# Altium PCB slave.PcbDoc
Units mil, origin at the board's own origin, x right, y up, seen from the top; angles counter-clockwise.
Board outline 6000 x 4000 mil, 2 copper layers (Top Layer, Bottom Layer); 82 components, 86 nets, 301 pads, 28 vias.
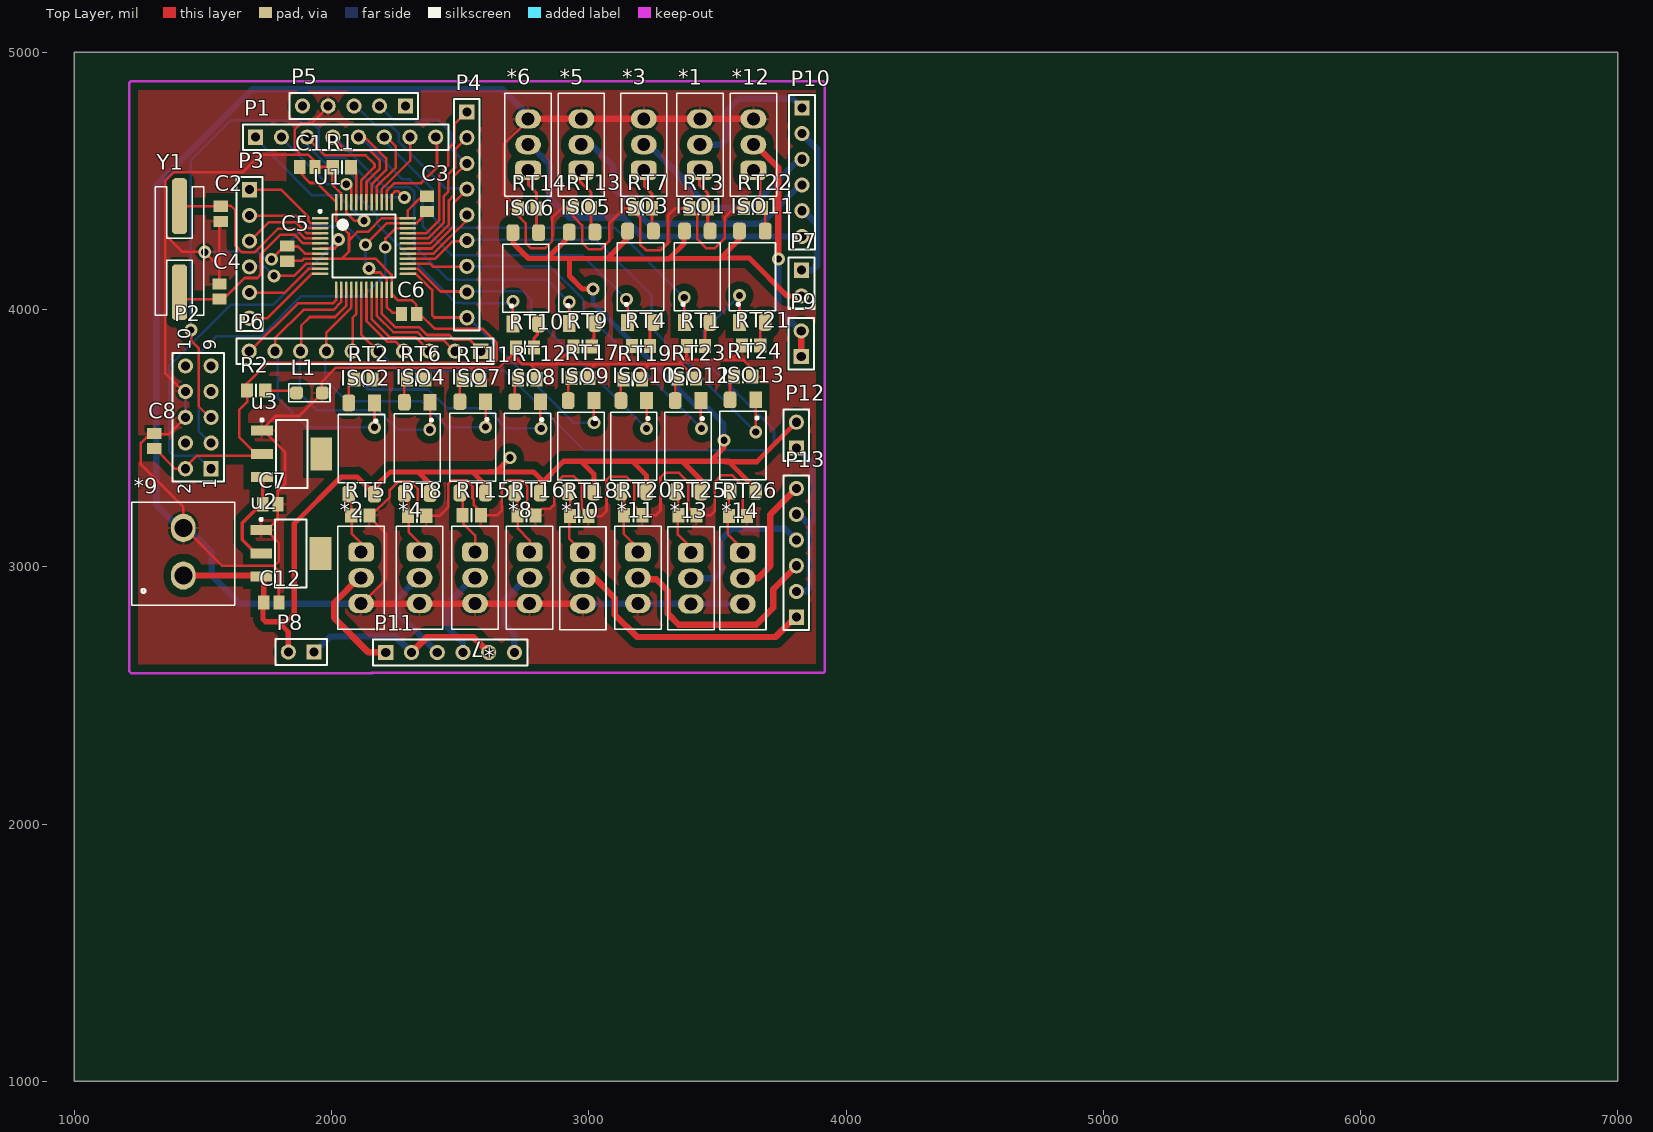
[diagram p0: Top Layer view]
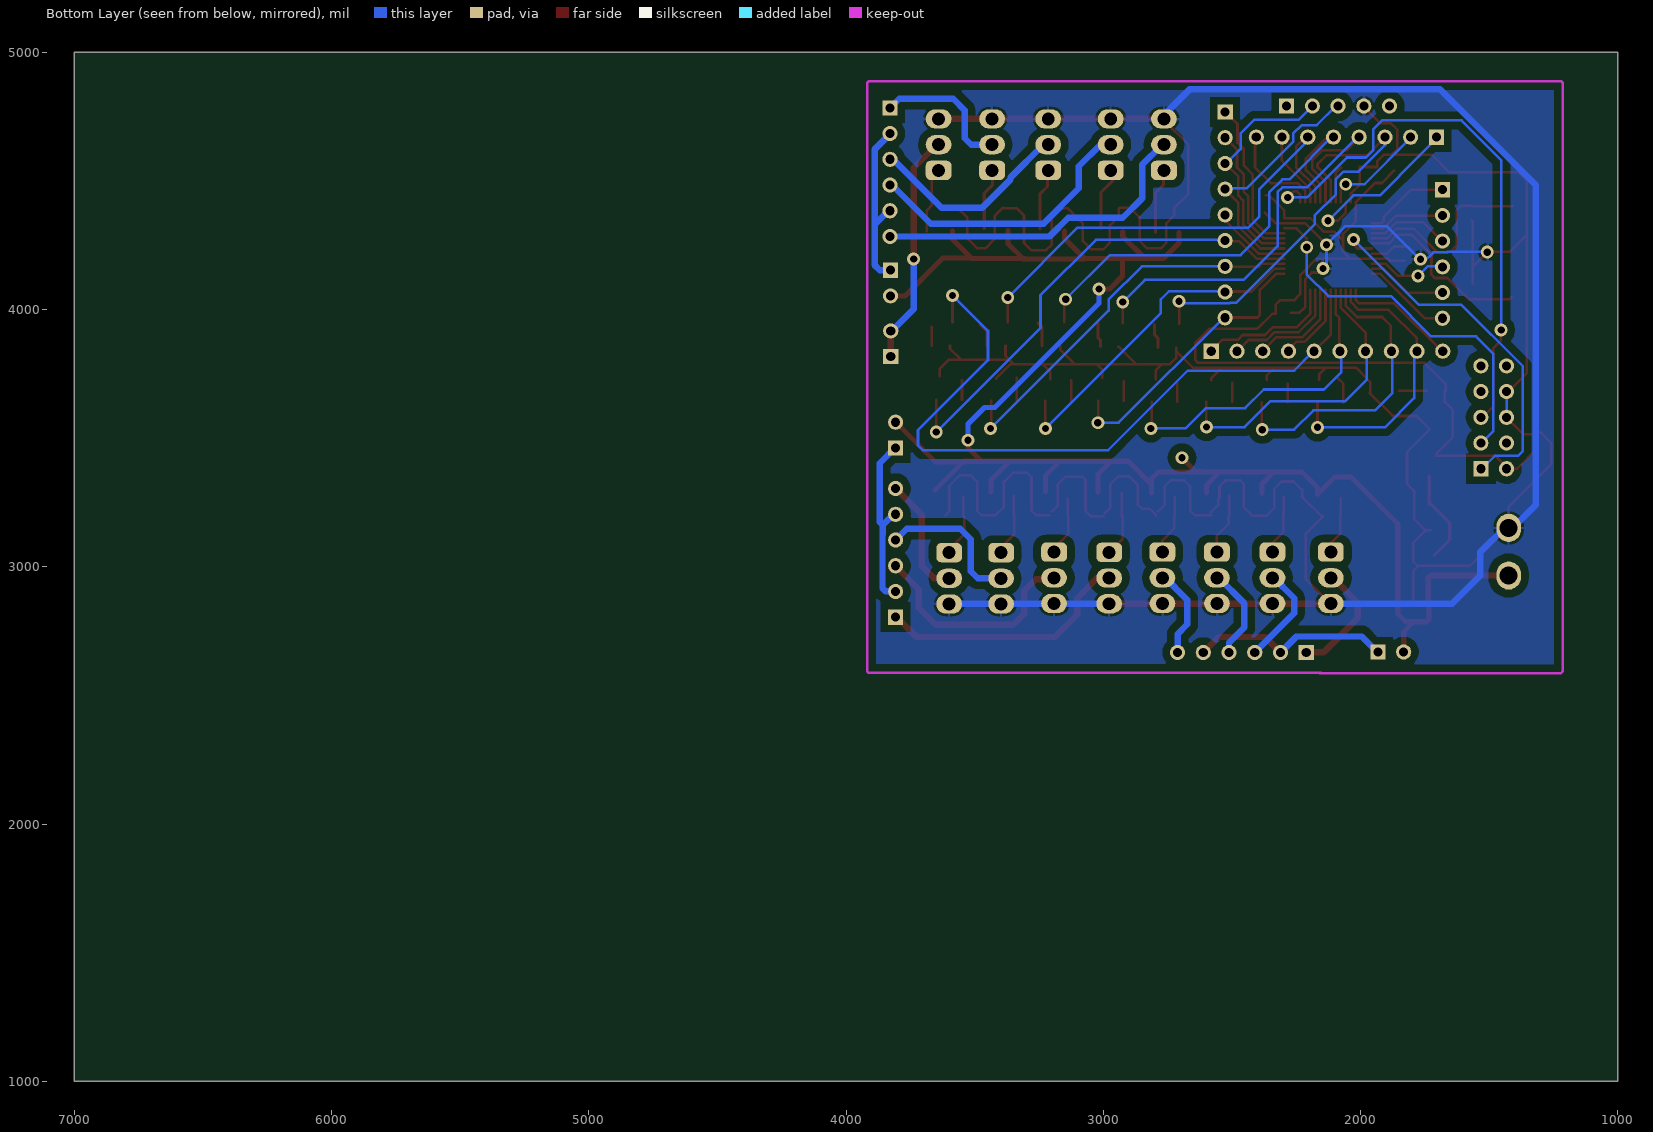
[diagram p1: Bottom Layer view, seen from below]

## Layer stack, top to bottom
Top Solder: solder mask 0.4, Solder Resist, Dk 3.5
Top Layer: signal copper 1.4
Dielectric 1: dielectric 12.6, FR-4, Dk 4.8
Bottom Layer: signal copper 1.4
Bottom Solder: solder mask 0.4, Solder Resist, Dk 3.5

## Board outline
1000,1000 7000,1000 7000,5000 1000,5000

## Design rules (kind name [scope] priority, off if disabled: settings)
Clearance "PolyGon Pour Clearance" [InPolyGon] p1: gap=30
Clearance [All] p2: gap=9
Height [All] p1 off: minheight=0 maxheight=1000 prefheight=500
PolygonConnect [All] p1: connectstyle=Relief reliefconductorwidth=10 reliefentries=4 polygonreliefangle="90 Angle" airgapwidth=10
RoutingVias [All] p1: holewidth=25 width=60 viastyle="Through Hole" minholewidth=25 minwidth=40 maxholewidth=40 maxwidth=80
SolderMaskExpansion [All] p1: expansion=4
UnpouredPolygon [All] p1: allowunpoured=FALSE
Width [All] p1: maxlimit=100 minlimit=10 preferedwidth=20 minimp=50.000000 maximp=50.000000 favimp=50.000000
28 further rules are at their usual default settings.

## Components (designator, comment, footprint, x,y, rotation, side; value= is the part's Value field where it differs from the comment)
*1 "IRF540N" TO220 3432,4641 r90 top
*2 "IRF540N" TO220 2115,2957 r270 top
*3 "IRF540N" TO220 3214,4641 r90 top
*4 "IRF540N" TO220 2342,2957 r270 top
*5 "IRF540N" TO220 2971,4641 r90 top
*6 "IRF540N" TO220 2764,4641 r90 top
*7 "IRF540N" TO220 2558,2957 r270 top
*8 "IRF540N" TO220 2770,2957 r270 top
*9 "domino2" Domino_2 1424,2976 r90 top
*10 "IRF540N" TO220 2977,2956 r270 top
*11 "IRF540N" TO220 3191,2957 r270 top
*12 "IRF540N" TO220 3640,4641 r90 top
*13 "IRF540N" TO220 3397,2955 r270 top
*14 "IRF540N" TO220 3599,2955 r270 top
C1 "Cap Pol3" C0805 1906,4554 r0 top
C2 "Cap Pol3" C0805 1569,4372 r270 top
C3 "Cap Pol3" C0805 2371,4411 r270 top
C4 "Cap Pol3" C0805 1564,4070 r90 top
C5 "Cap Pol3" C0805 1828,4217 r90 top
C6 "Cap Pol3" C0805 2302,3983 r180 top
C7 "Cap Pol3" C0805 1762,3243 r0 top
C8 "Cap Pol3" C0805 1311,3489 r90 top
C12 "Cap Pol3" C0805 1766,2861 r0 top
ISO1 "opto" opto_smd 3372,3950 r90 top
ISO2 "opto" opto_smd 2167,3637 r270 top
ISO3 "opto" opto_smd 3151,3950 r90 top
ISO4 "opto" opto_smd 2383,3640 r270 top
ISO5 "opto" opto_smd 2924,3946 r90 top
ISO6 "opto" opto_smd 2705,3944 r90 top
ISO7 "opto" opto_smd 2599,3642 r270 top
ISO8 "opto" opto_smd 2812,3642 r270 top
ISO9 "opto" opto_smd 3020,3646 r270 top
ISO10 "opto" opto_smd 3225,3646 r270 top
ISO11 "opto" opto_smd 3586,3950 r90 top
ISO12 "opto" opto_smd 3436,3646 r270 top
ISO13 "opto" opto_smd 3649,3649 r270 top
L1 "led_smd" led_smd 1914,3676 r0 top
P1 "Header 8" HDR1X8 1705,4670 r0 top
P2 "Header 5X2" HDR2X5 1532,3381 r90 top
P3 "Header 6" HDR1X6 1681,4466 r270 top
P4 "Header 9" HDR1X9 2526,4768 r270 top
P5 "uart1" HDR1X5 2287,4791 r180 top
P6 "Header 10" HDR1X10 2580,3838 r180 top
P7 "Header 2" HDR1X2 3827,4153 r270 top
P8 "Header 2" HDR1X2 1932,2669 r180 top
P9 "Header 2" HDR1X2 3826,3817 r90 top
P10 "Header 6" HDR1X6 3829,4784 r270 top
P11 "Header 6" HDR1X6 2211,2667 r0 top
P12 "Header 2" HDR1X2 3807,3462 r90 top
P13 "Header 6" HDR1X6 3807,2804 r90 top
R1 "" 6-0805_N 2040,4553 r180 top
R2 "" 6-0805_N 1707,3685 r180 top
RT1 "Res Thermal" 6-0805_N 3417,3858 r180 top
RT2 "Res Thermal" 6-0805_N 2124,3728 r0 top
RT3 "Res Thermal" 6-0805_N 3427,4394 r180 top
RT4 "Res Thermal" 6-0805_N 3203,3858 r180 top
RT5 "Res Thermal" 6-0805_N 2112,3199 r0 top
RT6 "Res Thermal" 6-0805_N 2329,3728 r0 top
RT7 "Res Thermal" 6-0805_N 3211,4394 r180 top
RT8 "Res Thermal" 6-0805_N 2333,3198 r0 top
RT9 "Res Thermal" 6-0805_N 2976,3856 r180 top
RT10 "Res Thermal" 6-0805_N 2752,3852 r180 top
RT11 "Res Thermal" 6-0805_N 2545,3726 r0 top
RT12 "Res Thermal" 6-0805_N 2761,3729 r0 top
RT13 "Res Thermal" 6-0805_N 2973,4395 r180 top
RT14 "Res Thermal" 6-0805_N 2761,4393 r180 top
RT15 "Res Thermal" 6-0805_N 2545,3200 r0 top
RT16 "Res Thermal" 6-0805_N 2758,3199 r0 top
RT17 "Res Thermal" 6-0805_N 2968,3734 r0 top
RT18 "Res Thermal" 6-0805_N 2963,3197 r0 top
RT19 "Res Thermal" 6-0805_N 3171,3729 r0 top
RT20 "Res Thermal" 6-0805_N 3173,3200 r0 top
RT21 "Res Thermal" 6-0805_N 3631,3860 r180 top
RT22 "Res Thermal" 6-0805_N 3638,4395 r180 top
RT23 "Res Thermal" 6-0805_N 3381,3732 r0 top
RT24 "Res Thermal" 6-0805_N 3600,3740 r0 top
RT25 "Res Thermal" 6-0805_N 3384,3200 r0 top
RT26 "Res Thermal" 6-0805_N 3580,3197 r0 top
U1 "stm32f103c8t6" LQFP48_stm32 2126,4247 r0 top
u2 "ASM1117-5" SOT223 1842,3052 r0 top
u3 "ASM1117-3.3" SOT223 1845,3439 r0 top
Y1 "XTAL" xtal_smd 1409,4402 r270 top

## Footprints (in the part's own frame and the unit in brackets; to place one, negate y for a bottom-side part, rotate by r counter-clockwise, add the part's x,y. Pads: shape width x height; smd on the part's side, far side on the other; paste and mask are expansions set on the pad)
6-0805_N [mm] "Chip Resistor, Body 2.0x1.2mm, IPC Medium Density"
  rect 1.2x1.4 smd: 1(-0.9,0) 2(0.9,0)
  silkscreen extent 0,-0.6 0,0.6, body extent -1.07,-0.7 1.07,0.7, height 0.7
C0805 [mm] "Chip Capacitor, Body 2.0x1.3mm, IPC High Density"
  rect 1.1x1.4 smd: 1(-0.75,0) 2(0.75,0)
  body extent -1.1,-0.72 1.1,0.72, height 1.4
Domino_2 [mil]
  oval 110x95 hole 70: 1(-10,0) 2(175,0)
  silkscreen extent -125,-200 275,200
HDR1X2 [mm] "Connector; Header; 2 Position"
  rect 1.5x1.5 hole 0.9: 1(0,0)
  round 1.5 hole 0.9: 2(2.54,0)
  silkscreen extent -1.27,-1.27 3.81,1.27
HDR1X5 [mm] "Connector; Header; 5 Position"
  rect 1.5x1.5 hole 0.9: 1(0,0)
  round 1.5 hole 0.9: 2(2.54,0) 3(5.08,0) 4(7.62,0) 5(10.16,0)
  silkscreen extent -1.27,-1.27 11.43,1.27
HDR1X6 [mm] "Connector; Header; 6 Position"
  rect 1.5x1.5 hole 0.9: 1(0,0)
  round 1.5 hole 0.9: 2(2.54,0) 3(5.08,0) 4(7.62,0) 5(10.16,0) 6(12.7,0)
  silkscreen extent -1.27,-1.27 13.97,1.27
HDR1X8 [mm] "Connector; Header; 8 Position"
  rect 1.5x1.5 hole 0.9: 1(0,0)
  round 1.5 hole 0.9: 2(2.54,0) 3(5.08,0) 4(7.62,0) 5(10.16,0) 6(12.7,0) 7(15.24,0) 8(17.78,0)
  silkscreen extent -1.27,-1.27 19.05,1.27
HDR1X9 [mm] "Connector; Header; 9 Position"
  rect 1.5x1.5 hole 0.9: 1(0,0)
  round 1.5 hole 0.9: 2(2.54,0) 3(5.08,0) 4(7.62,0) 5(10.16,0) 6(12.7,0) 7(15.24,0) 8(17.78,0) 9(20.32,0)
  silkscreen extent -1.27,-1.27 21.59,1.27
HDR1X10 [mm] "Connector; Header; 10 Position"
  rect 1.5x1.5 hole 0.9: 1(0,0)
  round 1.5 hole 0.9: 2(2.54,0) 3(5.08,0) 4(7.62,0) 5(10.16,0) 6(12.7,0) 7(15.24,0) 8(17.78,0) 9(20.32,0) 10(22.86,0)
  silkscreen extent -1.27,-1.27 24.13,1.27
HDR2X5 [mm] "Connector; Header; 5x2 Position"
  rect 1.5x1.5 hole 0.9: 1(0,0)
  round 1.5 hole 0.9: 2(0,2.54) 3(2.54,0) 4(2.54,2.54) 5(5.08,0) 6(5.08,2.54) 7(7.62,0) 8(7.62,2.54) 9(10.16,0) 10(10.16,2.54)
  silkscreen extent -1.27,-1.27 11.43,3.81
led_smd [mil]
  rrect50% 50x50 smd: 1(-50,0) 2(50,0)
  silkscreen extent -80,-35 80,35
LQFP48_stm32 [mm] "TSQFP, 48-Leads, Body 7.00x7.00mm, Pitch 0.50mm, IPC High Density"
  rect 1.65x0.25 smd: 1(-4.325,2.75)
  oval 1.65x0.25 smd: 2(-4.325,2.25) 3(-4.325,1.75) 4(-4.325,1.25) 5(-4.325,0.75) 6(-4.325,0.25) 7(-4.325,-0.25) 8(-4.325,-0.75) 9(-4.325,-1.25) 10(-4.325,-1.75) 11(-4.325,-2.25) 12(-4.325,-2.75) 25(4.325,-2.75) 26(4.325,-2.25) 27(4.325,-1.75) 28(4.325,-1.25) 29(4.325,-0.75) 30(4.325,-0.25) 31(4.325,0.25) 32(4.325,0.75) 33(4.325,1.25) 34(4.325,1.75) 35(4.325,2.25) 36(4.325,2.75)
  oval 0.25x1.65 smd: 13(-2.75,-4.325) 14(-2.25,-4.325) 15(-1.75,-4.325) 16(-1.25,-4.325) 17(-0.75,-4.325) 18(-0.25,-4.325) 19(0.25,-4.325) 20(0.75,-4.325) 21(1.25,-4.325) 22(1.75,-4.325) 23(2.25,-4.325) 24(2.75,-4.325) 37(2.75,4.325) 38(2.25,4.325) 39(1.75,4.325) 40(1.25,4.325) 41(0.75,4.325) 42(0.25,4.325) 43(-0.25,4.325) 44(-0.75,4.325) 45(-1.25,4.325) 46(-1.75,4.325) 47(-2.25,4.325) 48(-2.75,4.325)
  silkscreen extent -4.45,-3.1 3.1,3.55, body extent -3.5,-3.5 3.5,3.5, height 1.6
opto_smd [mil]
  rect 65x50 smd: 1(0,0)
  rrect50% 65x50 smd: 2(0,-100) 3(355,-100) 4(355,0)
  silkscreen extent 45,-140 310,40
SOT223 [mm] "SOT223, 4-Leads, Body 6.50x7.00mm (avg), Pitch 2.30mm, IPC Medium Density"
  rect 2.15x1 smd: 1(-2.93,2.3) 2(-2.93,0) 3(-2.93,-2.3)
  rect 2.15x3.25 smd: 4(2.93,0)
  silkscreen extent -3.05,-3.35 1.55,3.47, body extent -1.86,-3.35 1.86,3.35, height 1.8
TO220 [mil]
  rrect50% 75x100 hole 50: 1(-100,0)
  oval 75x100 hole 50: 2(0,0) 3(100,0)
  silkscreen extent -200,-90 200,90
xtal_smd [mil]
  rrect50% 217x59 smd: 1(0,0) 2(335,0)
  silkscreen extent -75,-95 425,95

## Part data
C1 C2 C3 C4 C5 C6 C7 C8 C12: "Polarized Capacitor (Surface Mount)"
P1: "Header, 8-Pin"
P2: "Header, 5-Pin, Dual row"
P3 P10 P11 P13: "Header, 6-Pin"
P4: "Header, 9-Pin"
P5: library part "Header 5", "Header, 5-Pin"
P6: "Header, 10-Pin"
P7 P8 P9 P12: "Header, 2-Pin"
R1 R2: library part "Res Thermal", "Thermistor"
RT1 RT2 RT3 RT4 RT5 RT6 RT7 RT8 RT9 RT10 RT11 RT12 RT13 RT14 RT15 RT16 RT17 RT18 RT19 RT20 RT21 RT22 RT23 RT24 RT25 RT26: "Thermistor"
u3: library part ASM1117-5

## Via types
v1: diameter 50, hole 28, Top Layer to Bottom Layer, 28 vias

## Nets (pads, with @x,y where several pads share a name; then routed paths per layer and width w, separated by ;. In a path a pad name is that pad's centre, name@x,y a point inside that pad or via, vN(x,y) a via of type N, cw(c..) or ccw(c..) an arc to the next point about the centre after c; other vN are vias at no path point)
3V: C1.1 C3.1 C5.1 C6.1 C8.1 P2.2 R2.2 U1.9 U1.24 U1.36 U1.48 u3.2 | length 3691.3
  Top Layer w10: C8.1@1313,3459 1391,3381 P2.2 1432,3387 1477,3432 u3.2@1706,3432 ; R2.2@1669,3684 1669,3711 1751,3793 2631,3793 2643,3805 2643,3870 2588.53,3924.47 2401.53,3924.47 2343,3983 C6.1 ; R2.2 1671.57,3640.57 1641,3610 1641,3504 u3.2@1706,3439 ; C5.1@1828,4189 1885,4189 1893.79,4197.79 U1.9@1948,4197.79 ; C1.1@1869,4540 1917,4492 1943.01,4492 U1.48 2017.73,4344.27 2068,4294 2068,4226 2040,4198 ; U1.9@1948,4198 2040,4198 ; 2069,4271 2100,4302 2142,4302 2195.27,4355.27 U1.36 2296.28,4385.28 2328.13,4417.13 2329.13,4417.13 2356,4444 C3.1@2368,4444 ; U1.24@2234,4082 2234,4135 2171,4198 2040,4198 ; U1.24 2234.27,4059.73 2258.73,4035.27 2313.27,4035.27 2330,4018.54 C6.1@2330,3984
5V: C7.1 u2.2 u3.3 | length 367.1
  Top Layer w15: u2.2@1713,3045 1653,3105 1653,3170 1726,3243 C7.1 u3.3@1732.47,3350.53
GND: *1.3 *2.3 *3.3 *4.3 *5.3 *6.3 *7.3 *8.3 *9.2 *10.3 *11.3 *12.3 *13.3 *14.3 C1.2 C2.2 C3.2 C4.2 C5.2 C6.2 C7.2 C8.2 C12.2 L1.2 P2.6 P2.8 P5.4 R1.2 RT1.2 RT2.2 RT3.2 RT4.2 RT5.2 RT6.2 RT7.2 RT8.2 RT9.2 RT10.2 RT11.2 RT12.2 RT13.2 RT14.2 RT15.2 RT16.2 RT17.2 RT18.2 RT19.2 RT20.2 RT21.2 RT22.2 RT23.2 RT24.2 RT25.2 RT26.2 U1.8 U1.23 U1.35 U1.47 u2.1 u3.1 | length 20877.6
  Top Layer w10: C8.2@1299,3522 1259,3482 1259,3398 1424,3233 *9.2 ; C8.2@1313,3515 1366,3515 P2.6 ; *9.2@1429,3150 1575,3004 1774,3004 ; P2.8@1429,3677 1354,3752 1354,4290 ; v1@1506,4224 1420,4224 1354,4290 ; v1(1507,4223) 1563,4167 1563,4143 ; C4.2 1564,4344 C2.2@1567,4347 ; u2.1 1744.45,3142.55 u2.1@1746.5,3140.5 ; u3.1@1730,3534 1782,3586 1874,3586 L1.2 ; u3.1@1731,3534 1819,3446 1819,3322 1791.53,3294.53 C7.2 1791.53,3185.53 u2.1@1746.5,3140.5 ; u2.1@1744,3138 u2.1@1746.5,3140.5 ; v1(1766.44,4195.71) 1767.23,4195.71 1818.04,4246.53 C5.2 ; 1793,2985 1774,3004 ; C12.2 1795.53,2983.47 ; C5.2@1827,4245 1869,4245 1896.53,4217.47 U1.8 ; L1.2@1962,3679 1962,3718 2018,3774 2134,3774 ; P5.4@1982,4784 1922,4724 1882,4724 1857,4699 1857,4625 1881,4601 ; R1.2@2003,4554 C1.2 1935.53,4575.47 1910,4601 1881,4601 ; R1.2@2004,4546 2002,4544 2002,4486 2024.24,4463.76 2025.57,4463.76 2037.42,4451.91 U1.47 ; *2.3@2122,2861 2212,2951 2212,3129 2147.43,3193.57 RT5.2 2153.98,3199 2227,3272.02 2227,3298.98 2259.52,3331.5 2306.48,3331.5 2335.19,3302.79 2335.19,3227.81 RT8.2@2366,3197 ; v1(2132,4252) 2215.58,4335.58 U1.35 2330.91,4335.58 2342.76,4347.43 2342.76,4347.76 C3.2@2371,4376 ; v1(2146,4159) 2146,4156 2158,4144 2189,4144 2214.58,4118.42 U1.23 2214.58,4010.42 2237,3988 C6.2@2270,3988 ; RT2.2@2163,3731.57 RT2.2 2159.43,3748.57 2134,3774 ; RT6.2 2364.43,3742.57 2333,3774 ; RT8.2 2420,3198 2453,3231 2453,3322 2467,3336 2525,3336 2548,3313 2548,3267 2553,3262 2553,3240 RT15.2@2581,3212 ; RT15.2 2644,3200 2662,3218 2662,3313 2685,3336 2738,3336 2761,3313 2761,3241 RT16.2@2787,3215 ; RT11.2 2580.43,3731.57 2538,3774 ; RT10.2 RT10.2@2716.57,3838.57 ; RT14.2 RT14.2@2724,4394.57 ; *6.3@2763,4735 2669,4641 2669,4449.57 RT14.2@2724,4394.57 ; 2773,3787 2796.43,3763.57 RT12.2 ; RT16.2 2820.43,3226 2850,3226 2865,3241 2865,3317 2900,3352 2941,3352 2972,3321 2972,3231 RT18.2@2994,3209 ; RT13.2 2895,4395 2858,4358 2858,4267 2829,4238 2776,4238 2755,4259 2755,4335 2724,4366 RT14.2@2724,4394.57 ; RT13.2@2940,4392 2940,4361 2974,4327 2974,4260 3000,4234 3047,4234 3079,4266 3079,4334 3139,4394 RT7.2 ; RT9.2 2872.57,3788 ; RT18.2 3049,3197 3069,3217 3069,3338 3081,3350 3147,3350 3176,3321 3176,3239 RT20.2@3200,3215 ; RT17.2 3003.43,3765.43 3025,3787 ; 3112,3789 3167.57,3844.57 RT4.2 ; RT7.2@3179,4379 3200,4358 3200,4253 3222,4231 3280,4231 3308,4259 3308,4365 3337,4394 RT3.2 ; RT19.2 3206.43,3758.43 3236,3788 ; RT20.2 3260,3200 3279,3219 3279,3348 3296,3365 3351,3365 3386.19,3329.81 3386.19,3232.81 RT25.2@3416,3203 ; 3349,3788 3360.55,3788 3416.43,3732.11 RT23.2 ; RT1.2@3380,3860 3380,3820 3364,3804 ; RT3.2@3391,4395 3422,4364 3422,4274 3458,4238 3489,4238 3528,4277 3528,4357 3566,4395 RT22.2 ; RT25.2 3473,3200 3490,3217 3490,3330 3516,3356 3556.98,3356 3598,3314.98 3598,3216 RT26.2@3614,3200 ; 3553,3805 3595.57,3847.57 RT21.2 ; RT24.2 3635.43,3770.57 3602,3804 3364,3804 ; 1354,4290 1354,4501 1386,4533 1653,4533 1721,4601 1881,4601 ; u2.1@1746.5,3140.5 1795,3092 1795,3020 1779,3004 1774,3004 ; 2134,3774 2333,3774 ; 2333,3774 2538,3774 ; 2538,3774 2652,3774 RT10.2@2716.57,3838.57 ; RT10.2@2716.57,3838.57 2716.57,3811.43 2740,3788 2872.57,3788 ; 2872.57,3788 3236,3788 ; 3236,3788 3348,3788 3364,3804
  Top Layer w20: *12.3@3642,4741 *12.3@3644,4741
  Top Layer w25: *2.3 *4.3 *7.3 *8.3 *10.3@2979,2857 ; *6.3 *5.3 *3.3 *1.3 *12.3 *12.3@3642,4741
  Bottom Layer w10: P2.6@1432,3582 P2.8 ; v1(1507,4223) 1508,4224 1661.44,4224 1662.97,4222.47 1716.65,4222.47 1754.92,4184.2 v1(1766.44,4195.71) ; v1@1767,4193 1897,4323 2061,4323 v1(2132,4252) v1@2132,4173 ; v1(2146,4159) v1@2146,4162
  Bottom Layer w25: *9.2@1425,3151 *9.2 1408,3151 1318,3241 1318,4483.48 1691.52,4857 2663,4857 2764,4756 *6.3 ; *9.2@1433,3158 1535,3056 1535,2965 1643,2857 *2.3 ; *10.3 *11.3@3190,2856 ; *11.3 *14.3@3602,2857
GRIP: *12.2 P9.1 P9.2 | length 903.9
  Top Layer w25: *12.2 3646.92,4641 3737,4550.92 v1(3737,4196) ; P9.1 P9.2@3826,3914
  Bottom Layer w25: v1(3737,4196) 3737,4002 3823,3916 P9.2@3823,3914
M1A1: *1.2 P10.1 | length 546.1
  Bottom Layer w25: *1.2 3513,4641 3538,4666 3538,4774 3583,4819 3793,4819 P10.1@3827,4785
M1A2: *3.2 P10.3 | length 805.5
  Bottom Layer w25: *3.2 3233,4641 3360.5,4513.5 3360.5,4505.58 3471.08,4395 3628,4395 3821,4588 P10.3@3833,4588
M1B1: *5.2 P10.4 | length 1096.7
  Bottom Layer w25: *5.2 3011,4641 3095,4557 3095,4471 3232,4334 3671,4334 P10.4@3826,4489
M1B2: *6.2 P10.6 | length 1294.6
  Bottom Layer w25: *6.2 2770.92,4641 2849,4562.92 2849,4432 2924,4357 3136,4357 3209,4284 P10.6 P10.6@3834,4284
M2A1: *2.2 P11.1 | length 459.8
  Top Layer w25: *2.2@2112,2962 2010,2860 2010,2801 2144,2667 P11.1
M2A2: *4.2 P11.3 | length 387.9
  Bottom Layer w25: 2258,2877 2258,2820 P11.3 ; 2259,2879 *4.2@2340,2960
M2B1: *7.2 P11.4 | length 361.9
  Bottom Layer w25: P11.4 2511,2705 2451,2765 2451,2857 *7.2@2555,2961
M2B2: *8.2 P11.6 | length 351.3
  Bottom Layer w25: P11.6 2711,2738 2673,2776 2673,2871 *8.2@2766,2964
M3A1: *10.2 P13.1 | length 987.4
  Top Layer w25: *10.2 3023,2956 3101,2878 3101,2814 3188,2727 3726,2727 P13.1@3801,2802
M3A2: *11.2 P13.3 | length 881.6
  Top Layer w25: *11.2 3196,2952 3262,2952 3307,2907 3307,2818 3350,2775 3651,2775 3717,2841 3717,2913 P13.3@3808,3004
M3B1: *13.2 P13.4 | length 578.1
  Bottom Layer w25: *13.2 3488,2955 3515,2982 3515,3107 3556,3148 3764,3148 P13.4@3805,3107
M3B2: *14.2 P13.6 | length 471.1
  Top Layer w25: *14.2 3658,2955 3706,3003 3706,3203 P13.6 P13.6@3808,3305
Net*1_1: *1.1 ISO1.3 RT3.1 | length 240.5
  Top Layer w12: *1.1@3431,4542 3431,4482.87 3462.43,4451.43 RT3.1 ISO1.3@3462.43,4314.57
Net*2_1: *2.1 ISO2.3 RT5.1 | length 230.8
  Top Layer w10: RT5.1 ISO2.3@2076.57,3265.43 ; RT5.1@2078,3206 2078,3130 2115,3093 *2.1
Net*3_1: *3.1 ISO3.3 RT7.1 | length 240.6
  Top Layer w12: *3.1@3217,4541 3217,4478 3246.43,4448.57 RT7.1 ISO3.3@3246.43,4312.57
Net*4_1: *4.1 ISO4.3 RT8.1 | length 238.8
  Top Layer w10: RT8.1 ISO4.3@2297.57,3271.43 ; RT8.1@2300,3205 2300,3135 2342,3093 *4.1
Net*5_1: *5.1 ISO5.3 RT13.1 | length 243.3
  Top Layer w12: *5.1@2963,4540 2963,4501 3008.43,4455.57 RT13.1 ISO5.3@3008.43,4315.57
Net*6_1: *6.1 ISO6.3 RT14.1 | length 253.5
  Top Layer w12: *6.1@2765,4540 2765,4486 2796.43,4454.57 RT14.1 ISO6.3@2796.43,4299.57
Net*7_1: *7.1 ISO7.3 RT15.1 | length 234.1
  Top Layer w10: RT15.1 ISO7.3@2509.57,3275.43 ; RT15.1@2513,3197 2513,3167 2558,3122 *7.1
Net*8_1: *8.1 ISO8.3 RT16.1 | length 237.5
  Top Layer w10: RT16.1 ISO8.3@2722.57,3271.43 ; RT16.1@2724,3203 2724,3148 2770,3102 *8.1
Net*10_1: *10.1 ISO9.3 RT18.1 | length 254.4
  Top Layer w10: RT18.1@2924,3198 2924,3109 *10.1 ; RT18.1 ISO9.3@2927.57,3287.43
Net*11_1: *11.1 ISO10.3 RT20.1 | length 230.2
  Top Layer w10: RT20.1@3136,3200 3136,3128 3191,3073 *11.1 ; RT20.1 ISO10.3@3137.57,3264.43
Net*12_1: *12.1 ISO11.3 RT22.1 | length 213.9
  Top Layer w10: *12.1@3667,4511 3667,4404 3686,4385 ISO11.3
Net*13_1: *13.1 ISO12.3 RT25.1 | length 245.6
  Top Layer w10: RT25.1@3346,3203 3346,3125 3397,3074 *13.1 ; RT25.1 ISO12.3@3348.57,3276.43
Net*14_1: *14.1 ISO13.3 RT26.1 | length 236.6
  Top Layer w10: RT26.1@3541,3195 3541,3126 3599,3068 *14.1 ; RT26.1 ISO13.3@3544.57,3269.57
NetC2_1: C2.1 U1.5 Y1.1 | length 760.2
  Top Layer w10: Y1.1 C2.1@1570,4402 ; C2.1@1565,4403 1609,4403 1626,4386 1626,4249 1652.53,4222.47 1700.47,4222.47 1792,4314 1859.18,4314 1896.65,4276.53 U1.5
NetC4_1: C4.1 U1.6 Y1.2 | length 708.1
  Top Layer w10: Y1.2@1413,4047 1419.53,4040.47 C4.1 ; C4.1@1567,4039 1578.44,4039 1662.44,4123 1662.97,4122.47 1711.47,4122.47 1724.53,4135.53 1724.53,4184.03 1724,4184.56 1724,4214 1801,4291 1855.31,4291 1889.47,4256.84 U1.6
NetISO1_2: ISO1.2 RT1.1 | length 96
  Top Layer w12: RT1.1 3452.43,3916.43 ISO1.2@3479,3943
NetISO2_2: ISO2.2 RT2.1 | length 103.3
  Top Layer w10: ISO2.2 2067,3712 RT2.1@2087,3732
NetISO3_2: ISO3.2 RT4.1 | length 95
  Top Layer w12: RT4.1 3238.43,3932.43 ISO3.2@3253,3947
NetISO4_2: ISO4.2 RT6.1 | length 71
  Top Layer w10: ISO4.2 RT6.1@2283,3711
NetISO5_2: ISO5.2 RT9.1 | length 95.5
  Top Layer w12: RT9.1 3011.43,3880.43 3020,3889 ISO5.2@3020,3948
NetISO6_2: ISO6.2 RT10.1 | length 95.2
  Top Layer w12: RT10.1 2787.43,3889.43 2800,3902 ISO6.2@2800,3942
NetISO7_2: ISO7.2 RT11.1 | length 74
  Top Layer w10: ISO7.2 RT11.1@2499,3716
NetISO8_2: ISO8.2 RT12.1 | length 72
  Top Layer w10: ISO8.2 RT12.1@2712,3714
NetISO9_2: ISO9.2 RT17.1 | length 75
  Top Layer w10: ISO9.2 RT17.1@2920,3721
NetISO10_2: ISO10.2 RT19.1 | length 78
  Top Layer w10: ISO10.2 RT19.1@3125,3724
NetISO11_2: ISO11.2 RT21.1 | length 72.4
  Top Layer w10: RT21.1 ISO11.2@3666.43,3932.43
NetISO12_2: ISO12.2 RT23.1 | length 89
  Top Layer w10: ISO12.2 RT23.1@3336,3735
NetISO13_2: ISO13.2 RT24.1 | length 76
  Top Layer w10: ISO13.2 RT24.1@3549,3725
NetL1_1: L1.1 R2.1 | length 106.6
  Top Layer w10: R2.1 L1.1@1849,3685
NetR1_1: R1.1 U1.44 | length 143.6
  Top Layer w10: R1.1@2075,4552 2096.47,4530.53 U1.44
NRST: P2.1 U1.7 | length 1485
  Top Layer w10: U1.7 2012.16,4237.16 2027,4252 v1(2027,4272)
  Bottom Layer w10: P2.1@1534,3375 1478,3431 1388,3431 1369,3450 1369,3779.56 1608.44,4019 1774,4019 v1(2027,4272)
PA0: P3.4 U1.10 | length 307.6
  Top Layer w10: v1(1776,4131) 1855,4131 1902.1,4178.1 U1.10
  Bottom Layer w10: P3.4@1683,4168 1739,4168 v1(1776,4131)
PA1: P3.5 U1.11 | length 312.4
  Top Layer w10: P3.5@1682,4065 1817,4065 1910.42,4158.42 U1.11
PA2: P3.6 U1.12 | length 346.3
  Top Layer w10: P3.6 1749,3966 1921.73,4138.73 U1.12
PA3: P6.10 U1.13 | length 462.7
  Top Layer w10: P6.10@1679,3834 1869,4024 2005,4024 2017.73,4036.73 U1.13
PA4: ISO2.1 P6.9 U1.14 | length 1114.6
  Top Layer w10: P6.9@1781,3842 1781,3889 1891,3999 2006.87,3999 2037.42,4029.55 U1.14 ; v1(2167,3542) ISO2.1
  Bottom Layer w10: P6.9@1780,3839 1791,3828 1791,3656 1905,3542 v1(2167,3542)
PA5: ISO4.1 P6.8 U1.15 | length 1201.9
  Top Layer w10: P6.8@1882,3838 1882,3937 1916,3971 2014,3971 2057.1,4014.1 U1.15 ; v1(2382,3533) 2383,3534 ISO4.1
  Bottom Layer w10: P6.8@1876,3836 1876,3675 1943,3608 2183,3608 2258,3533 v1(2382,3533)
PA6: ISO7.1 P6.7 U1.16 | length 1182.4
  Top Layer w10: P6.7@1980,3842 1980,3910 2021.87,3951.87 2021.87,3952 2076.1,4006.23 2076.1,4076.04 U1.16 ; v1(2599,3543) ISO7.1
  Bottom Layer w10: P6.7@1975,3836 1975,3728 2059,3644 2349,3644 2450,3543 v1(2599,3543)
PA7: ISO8.1 P6.6 U1.17 | length 1257.3
  Top Layer w10: P6.6@2082,3838 2082,3968 2096.47,3982.47 U1.17 ; ISO8.1 2812,3541 v1(2815,3538)
  Bottom Layer w10: P6.6@2075,3833 2075,3756 2142,3689 2376,3689 2448,3617 2601,3617 2680,3538 v1(2815,3538)
PA8: P4.5 U1.29 | length 312
  Top Layer w10: U1.29 2396.47,4217.47 2530,4351 P4.5@2530,4374
PA9: P4.4 P5.3 U1.30 | length 969.9
  Top Layer w10: U1.30 2389.29,4237.16 2475,4322.87 2475,4414 P4.4@2527,4466
  Bottom Layer w10: P5.3 2096,4791 2170,4717 2228,4717 2261.47,4683.53 2261.47,4651.97 2442.44,4471 P4.4@2527,4471
PA10: P4.3 P5.2 U1.31 | length 923.3
  Top Layer w10: U1.31 2382.1,4256.84 2456,4330.74 2456,4424 2475,4443 2475,4517 P4.3 P4.3@2530,4572
  Bottom Layer w10: P5.2 2241,4737 2413,4737 2466,4684 2466,4624 P4.3@2521,4569
PA11: P4.2 U1.32 | length 534.1
  Top Layer w10: U1.32 2374.92,4276.53 2437,4338.61 2437,4441 2454,4458 2454,4526 2480,4552 2480,4622 P4.2 P4.2@2527,4669
PA12: P4.1 U1.33 | length 613.6
  Top Layer w10: U1.33 2367.73,4296.21 2418,4346.48 2418,4524 2453.43,4559.44 2453.43,4624.44 2478,4649 2478,4722 P4.1@2528,4772
PA15: P1.8 U1.38 | length 396.9
  Top Layer w10: U1.38 2214.58,4460.42 2245.17,4491 2348,4491 2410,4553 P1.8@2410,4673
PB0: ISO11.1 P6.5 U1.18 | length 2822.7
  Top Layer w10: U1.18 2116.16,3901.84 P6.5@2178,3840 ; ISO11.1 v1(3586,4055)
  Bottom Layer w10: P6.5@2184,3836 2258,3762 2672,3762 2981,3453 3701,3453 3720,3472 3720,3531 3448,3803 3448,3917 v1(3586,4055)
PB1: P6.4 U1.19 | length 315.3
  Top Layer w10: U1.19 2135.84,3956.29 2218.13,3874 2250,3874 P6.4@2283,3841
PB2: P6.3 U1.20 | length 386.5
  Top Layer w10: U1.20 2155.53,3963.47 2226,3893 2326,3893 P6.3@2378,3841
PB3: P1.7 U1.39 | length 294.7
  Top Layer w10: U1.39 2194.9,4467.6 2306,4578.7 P1.7@2306,4666
PB4: ISO1.1 P1.6 U1.40 | length 1902
  Top Layer w10: U1.40 2175.21,4478.21 2250,4553 2250,4634 P1.6@2207,4677 ; v1(3371,4047) 3371,4025 3372,4024 ISO1.1
  Bottom Layer w10: P1.6@2207,4672 2207,4654 2393,4468 2393,4361 2436,4318 3100,4318 v1(3371,4047)
PB5: ISO3.1 P1.5 U1.41 | length 1807
  Top Layer w10: P1.5@2109,4672 2127,4672 2212,4587 2212,4541.87 2155.53,4485.4 U1.41 ; v1(3146,4040) 3151,4035 ISO3.1
  Bottom Layer w10: P1.5@2104,4678 2276,4506 2304,4506 2355,4455 2355,4323 2466.47,4211.53 2974.47,4211.53 v1(3146,4040)
PB6: ISO5.1 P1.4 U1.42 | length 1797.3
  Top Layer w10: P1.4@2004,4669 2053,4620 2147,4620 2188,4579 2188,4548 2136,4496 2136,4417.43 U1.42 ; ISO5.1 v1(2924,4029)
  Bottom Layer w10: P1.4@2001,4667 2015,4667 2207,4475 2303,4475 2322,4456 2322,4247 2454,4115 2838,4115 v1(2924,4029)
PB7: ISO6.1 P1.3 U1.43 | length 1709.8
  Top Layer w10: P1.3@1904,4669 1974,4599 2133,4599 2167,4565 2167,4553.87 2116.16,4503.03 U1.43 ; ISO6.1 v1(2705,4032)
  Bottom Layer w10: P1.3@1904,4672 1904,4639.13 2007.13,4536 2066.79,4536 2096.47,4506.32 2096.47,4470.85 2096,4470.38 2096,4448 2177,4367 2177,4332 2483,4026 2506.44,4026 2507.97,4024.47 2697.47,4024.47 v1(2705,4032)
PB8: P1.2 U1.45 | length 412.3
  Top Layer w10: v1(2057.47,4487.01) 2070.99,4487.01 2076.79,4481.21 U1.45
  Bottom Layer w10: P1.2@1805,4666 1983.99,4487.01 v1(2057.47,4487.01)
PB9: P1.1 U1.46 | length 677
  Top Layer w10: U1.46 2057.1,4377.9 2090,4345 v1(2126,4345)
  Bottom Layer w10: P1.1@1704,4665 1772,4597 1772,4596 1924,4444 2027,4444 v1(2126,4345)
PB10: P6.2 U1.21 | length 458.8
  Top Layer w10: U1.21 2175.21,3976.79 2240,3912 2333.87,3912 2364.34,3881.53 2434.47,3881.53 P6.2@2477,3839
PB11: P6.1 U1.22 | length 537.5
  Top Layer w10: U1.22 2194.9,3983.97 2247.87,3931 2341.74,3931 2371.74,3901 2458,3901 2477,3882 2538,3882 P6.1@2580,3840
PB12: ISO9.1 P4.9 U1.25 | length 1112.9
  Top Layer w10: U1.25 2328.27,4138.73 2391,4076 2391,3978 2400,3969 P4.9@2530,3969 ; ISO9.1 3020,3561 v1(3021,3560)
  Bottom Layer w10: P4.9@2527,3973 2940,3560 v1(3021,3560)
PB13: ISO10.1 P4.8 U1.26 | length 1330
  Top Layer w10: U1.26 2335.45,4158.42 2423.87,4070 P4.8@2525,4070 ; v1(3225,3538) ISO10.1
  Bottom Layer w10: P4.8@2521,4069 2523,4071 2745,4071 2776,4040 2776,3987 v1(3225,3538)
PB14: ISO12.1 P4.7 U1.27 | length 1544.7
  Top Layer w10: U1.27 2382.9,4178.1 2394,4167 P4.7@2529,4167 ; ISO12.1 3436,3539 v1(3438,3537)
  Bottom Layer w10: P4.7@2527,4168 2850,4168 2979,4039 2979,3996 v1(3438,3537)
PB15: ISO13.1 P4.6 U1.28 | length 1894.8
  Top Layer w10: U1.28 2403.66,4197.79 2471.87,4266 P4.6@2527,4266 ; v1(3649,3524) ISO13.1
  Bottom Layer w10: P4.6@2522,4271 3029,4271 3244,4056 3244,3929 v1(3649,3524)
PC13: P3.1 U1.2 | length 336.8
  Top Layer w10: P3.1@1682,4465 1805,4465 1898.61,4371.39 1898.61,4371 1909.24,4360.37 1909.24,4344.55 1918.21,4335.58 U1.2
PC14: P3.2 U1.3 | length 295.7
  Top Layer w10: P3.2@1680,4364 1863,4364 1874.92,4352.08 1874.92,4352 1911.02,4315.9 U1.3
PC15: P3.3 U1.4 | length 321.5
  Top Layer w10: P3.3@1683,4266 1757,4340 1860,4340 1867,4333 1867.05,4333 1903.84,4296.21 U1.4
SUP1: P7.1 P10.2 P10.5 | length 694.2
  Bottom Layer w25: P10.2@3826,4684 3827,4684 3889,4622 3889,4330 ; P7.1 3869,4153 3889,4173 3889,4330 ; P10.5@3828,4391 3889,4330
SUP2: P8.1 P11.2 P11.5 | length 791.8
  Top Layer w25: P11.2@2307,2663 P11.2 2371,2727 2551,2727 P11.5
  Bottom Layer w25: P8.1@1928,2662 1995,2729 2249,2729 P11.2
SUP3: P12.1 P13.2 P13.5 | length 695.5
  Bottom Layer w25: P13.2 3846,2904 3858.03,2916.03 3858.03,3126.16 3857,3127.19 3857,3162 ; P12.1@3808,3464 3869,3403 3869,3174 3857,3162 ; P13.5@3814,3205 3857,3162
SWC: P2.5 U1.37 | length 2213.6
  Top Layer w10: v1(1453,3920) 1455,3922 1455,3878 1483,3850 1483,3624 P2.5@1533,3574 ; U1.37 2234.27,4447.27 2246.52,4459.52 2259.48,4459.52 v1(2283,4436)
  Bottom Layer w10: v1(1453,3920) 1453,3916 1452,3915 1452,4580 1607,4735 1916,4735 1950,4701 1950,4620 1979,4591 2053,4591 2208,4436 v1(2283,4436)
SWD: P2.3 U1.34 | length 1468.7
  Top Layer w10: v1(2209,4242) 2209,4277 2247.9,4315.9 U1.34
  Bottom Layer w10: P2.3@1533,3478 1483,3528 1483,3828 1551,3896 1725,3896 1881,4052 2125,4052 2209,4136 v1(2209,4242)
VIN: *9.1 C12.1 ISO1.4 ISO2.4 ISO3.4 ISO4.4 ISO5.4 ISO6.4 ISO7.4 ISO8.4 ISO9.4 ISO10.4 ISO11.4 ISO12.4 ISO13.4 P7.2 P8.2 P12.2 u2.3 | length 7178.6
  Top Layer w20: C12.1@1734,2867 1734,2796 1744,2786 1793,2786 ; u2.3@1735,2962 1736.47,2960.53 C12.1 ; P8.2 1832,2747 1793,2786 ; ISO4.4 2383,3322 2336,3369 ; ISO7.4 2599,3317 2547,3369 ; 2611,3370 2640,3370 v1(2694,3424) ; ISO6.4 2705,4259 2766,4198 2838,4198 ; ISO8.4 2812,3320 ; ISO5.4 2924,4284 2838,4198 ; v1(3017,4080) 2975,4080 2925,4130 2925,4198 ; ISO9.4 3020,3360 2970,3410 ; 3076,4197 3311,4197 3313,4199 ; ISO3.4 3151,4276 3073,4198 2925,4198 ; ISO10.4 3225,3354 3169,3410 ; 3304,4199 3313,4199 ; 3364,3409 3436,3337 ISO12.4 ; ISO1.4@3370,4306 3370,4256 3313,4199 ; 3515,4200 3624,4200 3771,4053 P7.2 ; v1(3526,3492) 3526,3463 3473,3410 ; 3533,3408 3544,3408 ; ISO11.4 3586,4273 3512,4199 3313,4199 ; ISO13.4@3653,3299 3544,3408 ; P12.2 3653,3408 3544,3408 ; 1793,2786 1824,2786 1855,2817 1855,3167 2037,3349 2100,3349 ISO2.4 2167,3308 2228,3369 2336,3369 ; 2336,3369 2547,3369 ; 2547,3369 2785,3369 2812,3342 2812,3320 ; 2812,3320 2902,3410 2970,3410 ; 2838,4198 2925,4198 ; 2970,3410 3169,3410 ; 3169,3410 3473,3410 ; 3473,3410 3542,3410 3544,3408
  Top Layer w25: *9.1 u2.3@1723,2966
  Bottom Layer w20: v1(3017,4080) 3017,4024 3422,3619 3462,3619 3526,3555 v1(3526,3492)
pads on no net: P2.4 P2.7 P2.9 P2.10 P5.1 P5.5 U1.1 u2.4 u3.4

## Polygon pours and split planes (outlines as drawn)
GND on Top Layer "Keep-Out Layer-No Net" (solid, remove dead copper, pour order 4): 1221,4881 1222,4880 3911,4880 3911,2596 3909,2594 1221,2594
GND on Bottom Layer "Keep-Out Layer-No Net" (solid, remove dead copper, pour order 6): 1222,4879 3894,4879 3899,4874 3903,4870 3903,2591 1230,2591 1223,2598

## Keep-outs
Keep-Out Layer:
  lines w10: 2154,2587 2155,2588 3913,2588 3918,2593 3918,4619 3917,4620 ; 2158,2586 1221,2586 1214,2593 1214,4882 1219,4887 3912,4887 3917,4882 3917,4616

## Text inside footprints (layer, text, board x,y; h text height)
P2: Top Overlay "10" at 1452,3841 h50 r90; Top Overlay "9" at 1552,3841 h50 r90; Top Overlay "1" at 1552,3301 h50 r90; Top Overlay "2" at 1452,3281 h50 r90